# EAGLE board hw-proto02 (EAGLE 7.3.0)
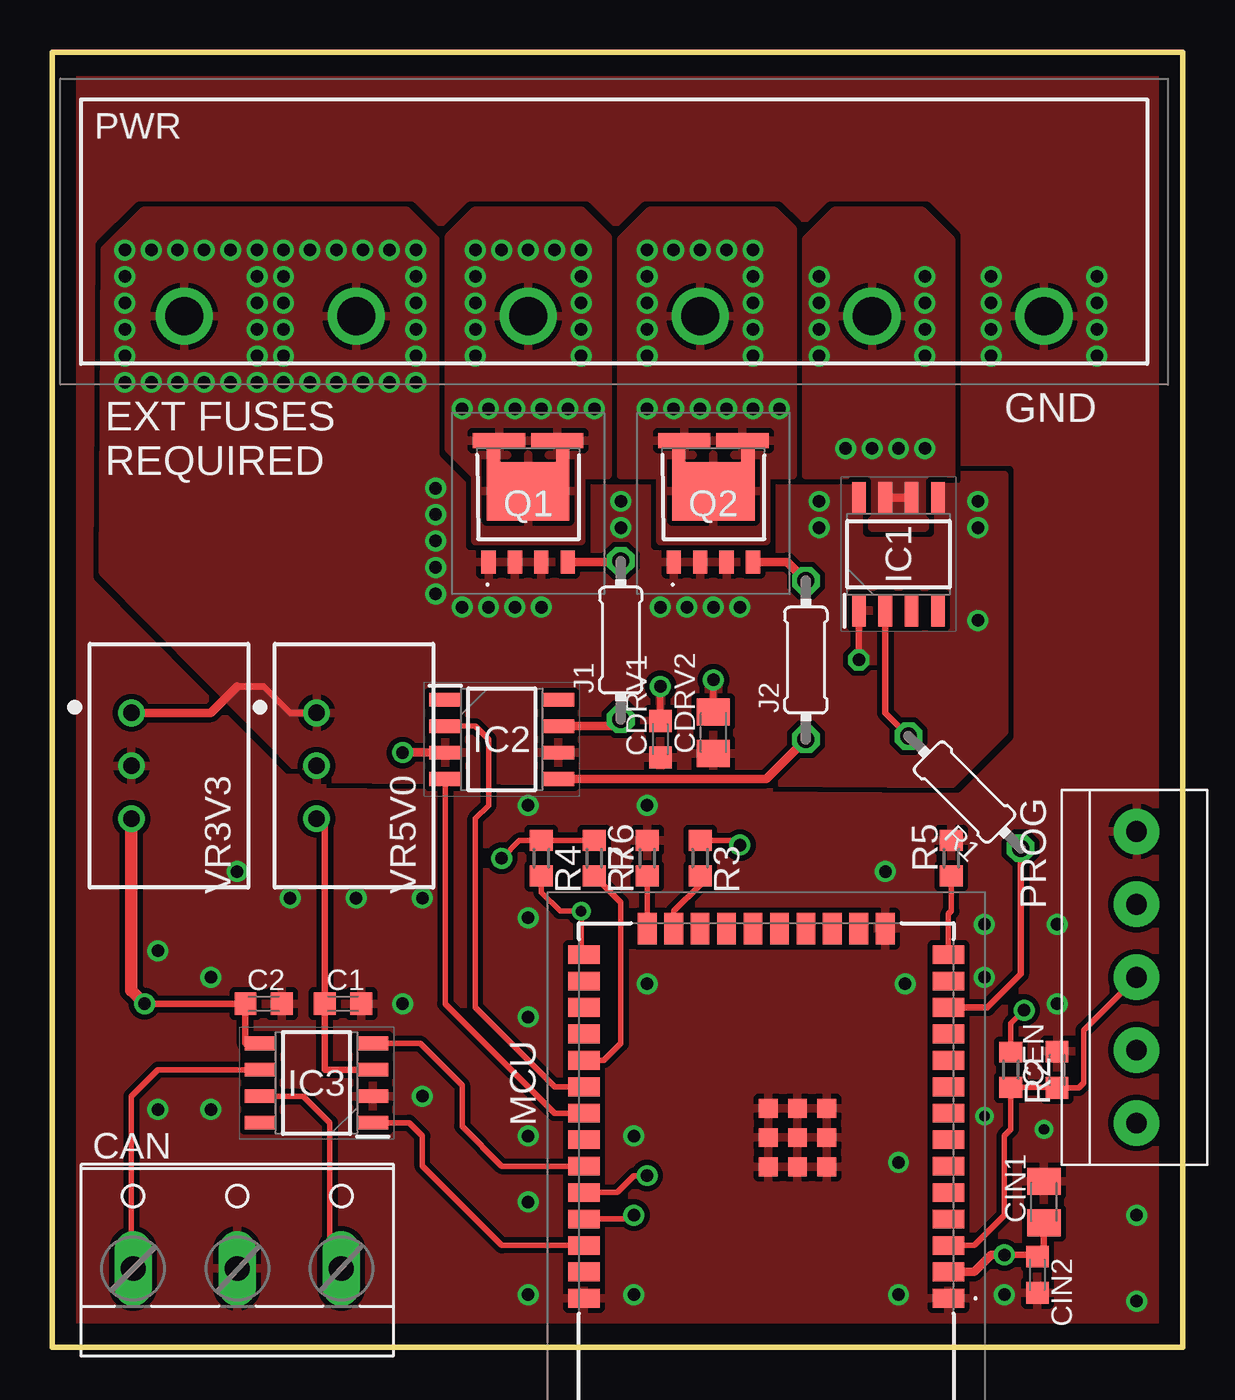
[diagram p0: board, top side]
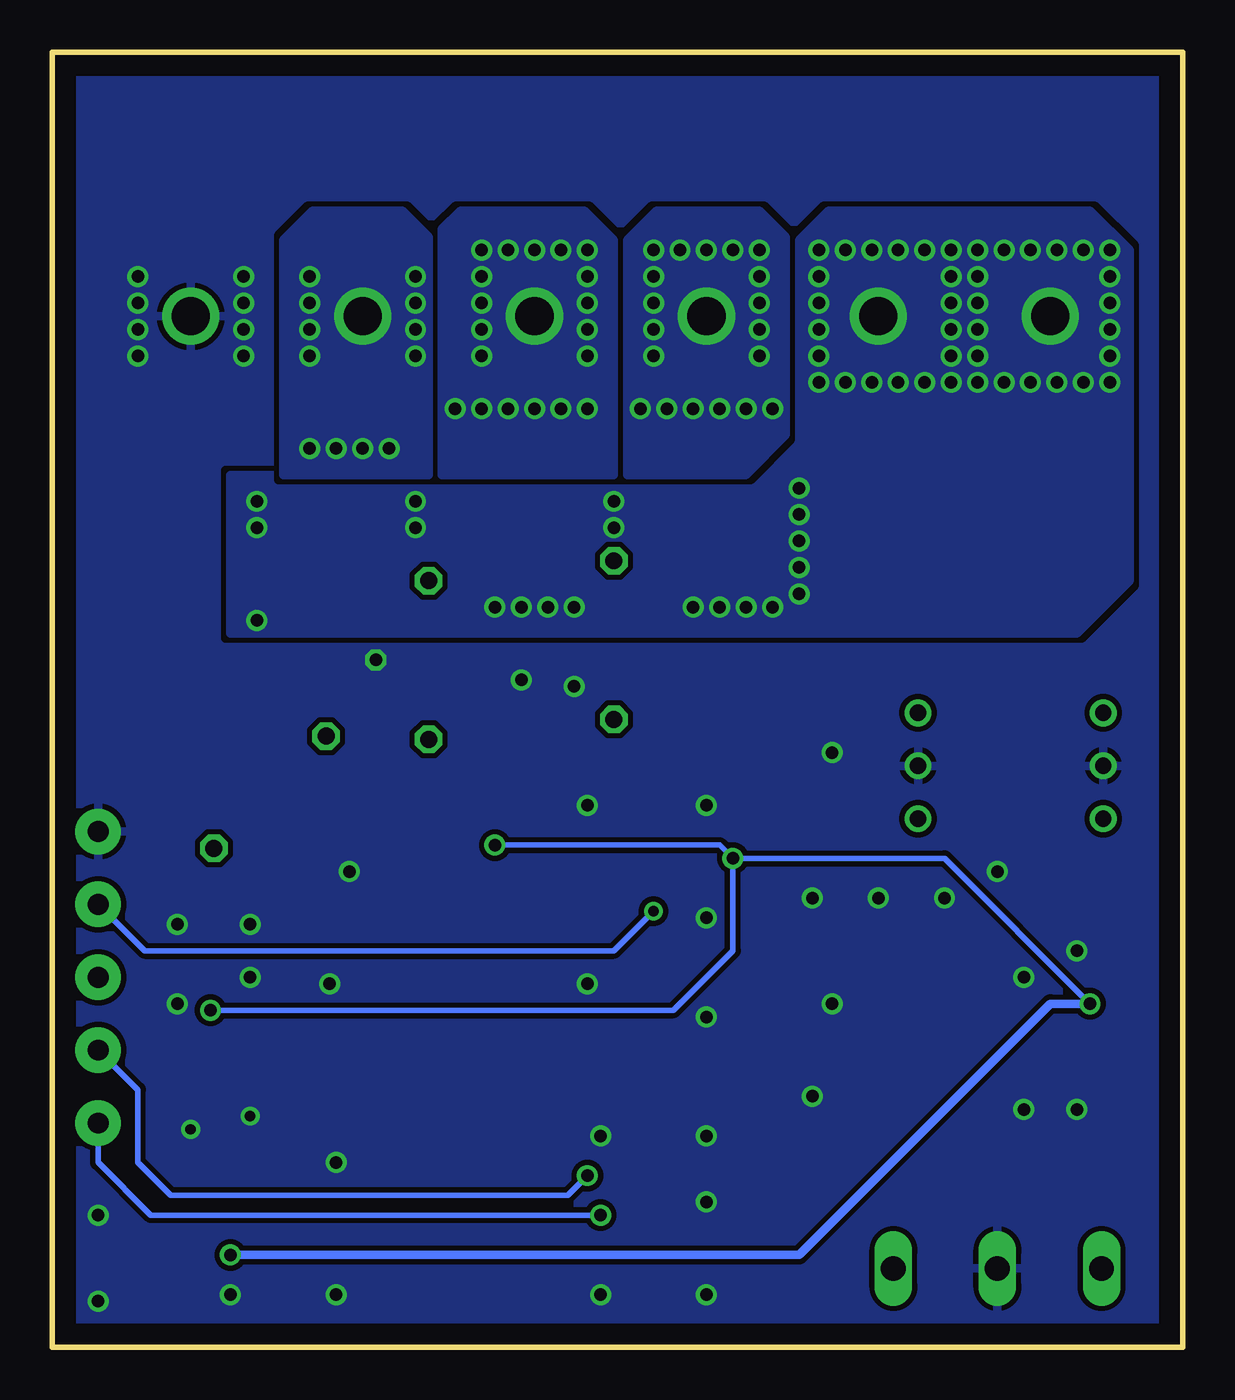
[diagram p1: board, bottom side, seen from below]

Size 54.28 x 62.22 mm. Coordinates in mm from the lower left corner, seen from the top.
Outline: 0,0 54.28,0 54.28,62.22 0,62.22 0,0
Copper layers (1*16): Top 0.035mm / dielectric 1.5mm / Bottom 0.035mm
Design rules "default": minimum track width 10mil, minimum drill 24mil, track to track 8mil, track to pad 8mil, pad to pad 8mil, via to via 8mil, smd to smd 8mil, copper to edge 40mil, drill to drill 8mil, minimum pad ring 10mil, minimum via ring 8mil, stop-mask expansion 4mil, vias tented up to drill 0mil, thermal gap 10mil

## Footprints (pad centres in the part's own frame; a part is rotated, then mirrored left to right if it is on the bottom)
C0603K = smd 1.05 x 1.08: 1 -0.875,0; 2 0.875,0
W237-103 = drill 1.194 long: 1 -5,-1.29; 2 0,-1.29; 3 5,-1.29
C0805K = smd 1.3 x 1.6: 1 -1,0; 2 1,0
SOIC127P600X175-8N = smd 1.525 x 0.65: 1 -2.712,1.905; 2 -2.712,0.635; 3 -2.712,-0.635; 4 -2.712,-1.905; 5 2.712,-1.905; 6 2.712,-0.635; 7 2.712,0.635; 8 2.712,1.905
SOIC127P600X175-8N' = smd 1.5 x 0.65: 1 -2.7,1.905; 2 -2.7,0.635; 3 -2.7,-0.635; 4 -2.7,-1.905; 5 2.7,-1.905; 6 2.7,-0.635; 7 2.7,0.635; 8 2.7,1.905
0204/7 = drill 0.813 octagon: 1 -3.81,0; 2 3.81,0
ESP32WROOM32EN8R2 = smd 1.5 x 0.9: 1 -8.75,5.26; 2 -8.75,3.99; 3 -8.75,2.72; 4 -8.75,1.45; 5 -8.75,0.18; 6 -8.75,-1.09; 7 -8.75,-2.36; 8 -8.75,-3.63; 9 -8.75,-4.9; 10 -8.75,-6.17; 11 -8.75,-7.44; 12 -8.75,-8.71; 13 -8.75,-9.98; 14 -8.75,-11.25; 25 8.75,-11.25; 26 8.75,-9.98; 27 8.75,-8.71; 28 8.75,-7.44; 29 8.75,-6.17; 30 8.75,-4.9; 31 8.75,-3.63; 32 8.75,-2.36; 33 8.75,-1.09; 34 8.75,0.18; 35 8.75,1.45; 36 8.75,2.72; 37 8.75,3.99; 38 8.75,5.26 | smd 0.9 x 1.5: 15 -5.715,-12.5; 16 -4.445,-12.5; 17 -3.175,-12.5; 18 -1.905,-12.5; 19 -0.635,-12.5; 20 0.635,-12.5; 21 1.905,-12.5; 22 3.175,-12.5; 23 4.445,-12.5; 24 5.715,-12.5 | smd 0.9 x 0.9: 39 -1.5,-2.46; 40 -2.9,-2.46; 41 -2.9,-3.86; 42 -1.5,-3.86; 43 -0.1,-3.86; 44 -0.1,-2.46; 45 -0.1,-1.06; 46 -1.5,-1.06; 47 -2.9,-1.06
1X05-3.5MM = drill 1 pad 2.184: 1 7,0; 2 3.5,0; 3 0,0; 4 -3.5,0; 5 -7,0
4DBP10806 = drill 1.829 pad 2.743: 1 0,0; 2 8.255,0; 3 16.51,0; 4 24.765,0; 5 33.02,0; 6 41.275,0
SQJ147ELPT1_GE3 = smd 0.68 x 1.1: 1 -1.905,-2.913; 2 -0.635,-2.913; 3 0.635,-2.913; 4 1.905,-2.913 | smd 2.5 x 0.71: 5 1.4,2.913; 6 -1.4,2.913 | smd 0.63 x 0.66: 7 1.665,2.228; 8 -1.665,2.228 | smd 3.96 x 2.82: 9 0,0.487
R0603 = smd 1 x 1.1: 1 -0.85,0; 2 0.85,0
TSR-1-2433 = drill 0.78 pad 1.28: 1 -2.54,0; 2 0,0; 3 2.54,0

## Placement (x,y rotation side)
C1  100n  [C0603K]  13.97,16.51 0 top
C2  100n  [C0603K]  10.16,16.51 0 top
CAN  [W237-103]  8.89,5.08 0 top
CDRV1  100n  [C0603K]  29.21,29.21 90 top
CDRV2  4u7  [C0805K]  31.75,29.53 90 top
CEN  1u  [C0603K]  48.26,13.34 90 top
CIN1  22u  [C0805K]  47.62,6.99 90 top
CIN2  100n  [C0603K]  47.31,3.49 270 top
IC1  [SOIC127P600X175-8N]  40.64,38.1 90 top
IC2  UCC27523DR  [SOIC127P600X175-8N]  21.59,29.21 0 top
IC3  MCP2562T  [SOIC127P600X175-8N']  12.7,12.7 180 top
J1  10  [0204/7]  27.3,33.97 90 top
J2  10  [0204/7]  36.2,33.02 90 top
MCU  ESP32-WROOM-32E  [ESP32WROOM32EN8R2]  34.29,7.62 180 top
PROG  1X5  [1X05-3.5MM]  52.07,17.78 270 top
PWR  [4DBP10806]  6.35,49.53 0 top
Q1  SQJ147ELP-T1_GE3  [SQJ147ELPT1_GE3]  22.86,40.64 0 top
Q2  SQJ147ELP-T1_GE3  [SQJ147ELPT1_GE3]  31.75,40.64 0 top
R1  100  [0204/7]  43.81,26.67 135 top
R2  10K0  [R0603]  46.04,13.34 270 top
R3  47K0  [R0603]  31.11,23.5 270 top
R4  47K0  [R0603]  23.5,23.5 270 top
R5  47K0  [R0603]  43.18,23.5 90 top
R6  47K0  [R0603]  28.57,23.5 90 top
R7  47K0  [R0603]  26.04,23.5 270 top
VR3V3  +3V3  [TSR-1-2433]  3.81,27.94 270 top
VR5V0  +5V  [TSR-1-2433]  12.7,27.94 270 top

## Library data of the parts
C1 C2 CDRV1 CDRV2 CEN CIN1 CIN2 J1 J2 R1-R7 = rcl
CAN = con-wago-500; MPN: 237-103; OC_FARNELL: unknown; OC_NEWARK: 18M7116
IC1 = VN5E160MSTR-E; DESCRIPTION: Gate Drivers SNGL CH HI-SIDE DRVR W/ANALOG CRRNT SNSE; HEIGHT: 1.75mm; MANUFACTURER_NAME: STMicroelectronics; MANUFACTURER_PART_NUMBER: VN5E160MSTR-E; MOUSER_PART_NUMBER: 511-VN5E160MSTR-E; MOUSER_PRICE-STOCK: https://www.mouser.co.uk/ProductDetail/STMicroelectronics/VN5E160MSTR-E?qs=WSSg0AwdCh77XxtxsYEeyw%3D%3D
IC2 = UCC27523DR-fet-driver; DESCRIPTION: Dual, 5A, High-Speed Low-Side Power MOSFET Driver; HEIGHT: 1.75mm; MANUFACTURER_NAME: Texas Instruments; MANUFACTURER_PART_NUMBER: UCC27523DR; MOUSER_PART_NUMBER: 595-UCC27523DR; MOUSER_PRICE-STOCK: https://www.mouser.co.uk/ProductDetail/Texas-Instruments/UCC27523DR/?qs=JK0Mn6q9DKQ5jNt3UHw5hw%3D%3D
IC3 = MCP2562T-H_SN; DESCRIPTION: CAN Interface IC; HEIGHT: 1.75mm; MANUFACTURER_NAME: Microchip; MANUFACTURER_PART_NUMBER: MCP2562T-H/SN; MOUSER_PART_NUMBER: 579-MCP2562T-H/SN; MOUSER_PRICE-STOCK: https://www.mouser.co.uk/ProductDetail/Microchip-Technology/MCP2562T-H-SN?qs=eTPcRhULBzwloCb8Xxk0jQ%3D%3D
MCU = ESP32-WROOM-32E-N8R2; DESCRIPTION: Multiprotocol Modules ESP32-WROOM-32E integrates ESP32-D0WD-V3, with higher stability and safety performance.; HEIGHT: 3.25mm; MANUFACTURER_NAME: Espressif Systems; MANUFACTURER_PART_NUMBER: ESP32-WROOM-32E-N8R2; MOUSER_PART_NUMBER: 356-ESP32WRM32EN8R2; MOUSER_PRICE-STOCK: https://www.mouser.co.uk/ProductDetail/Espressif-Systems/ESP32-WROOM-32E-N8R2?qs=By6Nw2ByBD0mvGJSS3Ohlw%3D%3D
PROG = adafruit
PWR = 4DB-P108-06; DESCRIPTION: Dual Barrier, Printed Circuit Pin, Wire-to-Board, 6 Position, 8.26 mm [.325 in] Centerline, 1 Row, Buchanan 4DB Series, Barrier Strips; HEIGHT: 13.716mm; MANUFACTURER_NAME: TE Connectivity; MANUFACTURER_PART_NUMBER: 4DB-P108-06; MOUSER_PART_NUMBER: N/A; MOUSER_PRICE-STOCK: https://www.mouser.co.uk/ProductDetail/TE-Connectivity/4DB-P108-06?qs=JZD3Rbs9Xzm1xbyNfnCHaQ%3D%3D
Q1 Q2 = transistor-vishay-pchan-pso8; DESCRIPTION: MOSFET P-CHANNEL 40-V (D-S) 175C MOSFET; HEIGHT: 1.227mm; MANUFACTURER_NAME: Vishay; MANUFACTURER_PART_NUMBER: SQJ147ELP-T1_GE3; MOUSER_PART_NUMBER: 78-SQJ147ELP-T1_GE3; MOUSER_PRICE-STOCK: https://www.mouser.co.uk/ProductDetail/Vishay-Siliconix/SQJ147ELP-T1_GE3?qs=81r%252BiQLm7BRdyhBg3DuaKw%3D%3D
VR3V3 VR5V0 = TSR_1-2433E; DESCRIPTION: 1 Amp POL converter, industrial, 6-36 VDC input, pos.-pos. circuit, cost efficient, LM78 compatible, SIP-3; HEIGHT: mm; MANUFACTURER_NAME: Traco Power; MANUFACTURER_PART_NUMBER: TSR 1-2433E; MOUSER_PART_NUMBER: 495-TSR1-2433E; MOUSER_PRICE-STOCK: https://www.mouser.co.uk/ProductDetail/TRACO-Power/TSR-1-2433E?qs=vmHwEFxEFR9haWIzn8wG3A%3D%3D

## Nets
+3V3: C2.1 CIN1.1 CIN2.1 IC3.5 MCU.2 R2.1 R3.1 R4.1 R7.1 VR3V3.3
+5V: C1.1 IC3.3 VR5V0.3
+12V: CDRV1.1 CDRV2.1 IC1.5 IC1.8 IC2.6 PWR.1 PWR.2 Q1.1 Q1.2 Q1.3 Q2.1 Q2.2 Q2.3 VR3V3.1 VR5V0.1
CAN_RX: IC3.4 MCU.33
CAN_TX: IC3.1 MCU.36
CTL1: IC2.2 MCU.30
CTL2: IC2.4 MCU.31
CTL3: MCU.12 R1.1
CTL4: MCU.11
EN: CEN.1 MCU.3 PROG.3 R2.2
GND: C1.2 C2.2 CAN.2 CDRV1.2 CDRV2.2 CEN.2 CIN1.2 CIN2.2 IC1.1 IC2.3 IC3.2 MCU.1 MCU.15 MCU.38 MCU.39 MCU.40 MCU.41 MCU.42 MCU.43 MCU.44 MCU.45 MCU.46 MCU.47 PROG.5 PWR.6 R5.2 R6.2 VR3V3.2 VR5V0.2
GPIO0: MCU.25 PROG.4 R4.2
GPIO2: MCU.24 R6.1
GPIO5: MCU.29 R7.2
GPIO12: MCU.14 R5.1
GPIO15: MCU.23 R3.2
N$1: CAN.3 IC3.7
N$2: CAN.1 IC3.6
N$3: IC2.5 J2.1
N$4: IC2.7 J1.1
N$5: J1.2 Q1.4
N$6: J2.2 Q2.4
N$7: IC1.2 R1.2
RXD0: MCU.34 PROG.2
SW1: PWR.3 Q1.5 Q1.6 Q1.7 Q1.8 Q1.9
SW2: PWR.4 Q2.5 Q2.6 Q2.7 Q2.8 Q2.9
SW3: IC1.6 IC1.7 PWR.5
TXD0: MCU.35 PROG.1

## Tracks (layer width: path | path; a pad name or v marks a point on that pad's centre or on a via)
+3V3  (via drill 0.6)
  Top 0.254: R7.1 R4.1 22.44,24.34 v21.59,23.5 | R3.1 33.02,24.34 v33.02,24.13 | R2.1 46.04,15.56 v46.67,16.19
  Top 0.305: v4.45,16.51 C2.1 9.29,14.61 IC3.5 | v45.72,4.45 47.23,4.45 CIN2.1 47.62,4.69 CIN1.1
  Top 0.406: MCU.2 44.27,3.63 45.08,4.45 v45.72,4.45
  Top 0.61: VR3V3.3 3.81,17.14 v4.45,16.51
  Bottom 0.254: v21.59,23.5 11.43,23.5 v4.45,16.51 | v33.02,24.13 22.23,24.13 v21.59,23.5 | v46.67,16.19 24.45,16.19 21.59,19.05 v21.59,23.5
  Bottom 0.406: v45.72,4.45 18.41,4.45 6.35,16.51 v4.45,16.51
+5V
  Top 0.305: IC3.3 13.1,13.34 C1.1 13.1,25 VR5V0.3
+12V  (via drill 0.6)
  Top 0.305: 8.89,31.75 10.16,31.75 11.43,30.48 VR5V0.1
  Top 0.406: VR3V3.1 7.62,30.48 8.89,31.75
  other vias: 3.49,51.43 17.46,50.16 17.46,48.89 17.46,47.62 3.49,50.16 3.49,48.89 3.49,47.62 18.41,37.46 18.41,36.2 44.45,39.37 44.45,34.92 44.45,40.64 3.49,46.35 4.76,46.35 6.03,46.35 7.3,46.35 8.57,46.35 9.84,46.35 11.11,46.35 12.38,46.35 19.68,35.56 20.96,35.56 22.23,35.56 23.5,35.56 18.41,38.73 18.41,40 27.3,40.64 27.3,39.37 29.21,35.56 30.48,35.56 31.75,35.56 33.02,35.56 36.83,40.64 36.83,39.37 18.41,41.27 13.65,46.35 14.92,46.35 16.19,46.35 17.46,46.35 9.84,47.62 9.84,48.89 9.84,50.16 9.84,51.43 11.11,51.43 11.11,50.16 11.11,48.89 11.11,47.62 3.49,52.7 4.76,52.7 6.03,52.7 7.3,52.7 8.57,52.7 9.84,52.7 11.11,52.7 12.38,52.7 13.65,52.7 14.92,52.7 16.19,52.7 17.46,52.7 17.46,51.43
  pour Top (isolate 0.254, rank 4): 2.42,37.23 2.53,52.72 4.43,54.61 17,54.61 18.41,53.19 18.41,44.16 20.66,41.91 45.72,41.91 45.72,29.58 43.2,27.07 12.27,27.3
  pour Top (isolate 0.254, rank 4, no thermals): 35.56,41.91 45.72,41.91 45.72,33.02 35.56,33.02
  pour Bottom (isolate 0.254, rank 4, no thermals): 17,54.61 4.45,54.61 2.54,52.7 2.54,36.83 5.08,34.29 45.72,34.29 45.72,41.91 20.66,41.91 18.41,44.16 18.41,53.19
CAN_RX
  Top 0.254: MCU.33 21.6,8.71 19.68,10.62 19.68,12.6 17.68,14.61 IC3.4
CAN_TX
  Top 0.254: IC3.1 17.14,10.79 17.78,10.16 17.78,8.71 21.59,4.9 MCU.36
CTL1
  Top 0.254: MCU.30 24.14,12.52 20.32,16.34 20.32,25.4 20.96,26.04 20.96,29.21 20.32,29.84 IC2.2
CTL2
  Top 0.254: MCU.31 24.13,11.25 18.88,16.51 IC2.4
CTL3
  Top 0.305: MCU.12 44.9,16.33 46.51,17.93 R1.1
EN
  Top 0.254: MCU.3 44.27,4.9 45.72,6.35 45.72,10.16 46.04,10.48 R2.2 48.23,12.49 CEN.1 49.29,12.46 49.53,12.7 49.53,15.24 PROG.3
GND  (via drill 0.5, 0.6)
  Top 0.305: IC1.1 v38.73,33.02 | v29.21,31.75 CDRV1.2 | v31.75,32.07 CDRV2.2
  Top 0.406: IC2.3 v16.83,28.57
  other vias: 17.78,12.07 22.86,10.16 22.86,20.64 22.86,2.54 45.72,2.54 22.86,26.04 22.86,15.88 28.57,26.04 22.86,6.99 17.78,21.59 14.61,21.59 11.43,21.59 40,22.86 7.62,17.78 5.08,19.05 8.89,22.86 52.07,2.22 47.62,10.48 44.77,11.11 16.83,16.51 45.08,47.62 45.08,48.89 45.08,50.16 45.08,51.43 50.16,51.43 50.16,50.16 50.16,48.89 50.16,47.62 40.96,17.46 28.57,17.46 44.77,17.78 44.77,20.32 27.94,2.54 40.64,2.54 40.64,8.89 27.94,10.16 52.07,6.35 48.26,16.51 48.26,20.32 5.08,11.43 7.62,11.43
  pour Bottom (isolate 0.254, rank 6): 0,62.23 54.61,62.23 54.61,0 0,0
  pour Top (isolate 0.254, rank 6): 0,62.23 54.61,62.23 54.61,0 0,0
GPIO0  (via drill 0.5)
  Top 0.254: MCU.25 25.54,19.05 25.4,19.05 v25.4,20.96 24.39,20.96 23.5,21.85 R4.2
  Bottom 0.254: PROG.4 49.84,19.05 27.3,19.05 v25.4,20.96
GPIO2
  Top 0.254: MCU.24 R6.1
GPIO5
  Top 0.254: R7.2 27.3,21.38 27.3,14.61 26.49,13.79 MCU.29
GPIO12
  Top 0.254: MCU.14 43.04,20.82 43.18,20.96 R5.1
GPIO15
  Top 0.254: MCU.23 29.84,20.96 31.11,22.23 R3.2
N$1
  Top 0.254: IC3.7 12.07,12.07 13.34,10.79 13.34,4.35 CAN.3
N$2
  Top 0.254: IC3.6 5.08,13.34 3.81,12.07 3.81,3.87 CAN.1
N$3
  Top 0.406: J2.1 34.29,27.3 IC2.5
N$4
  Top 0.406: IC2.7 26.99,29.84 J1.1
N$5
  Top 0.406: Q1.4 27.25,37.73 J1.2
N$6
  Top 0.406: Q2.4 35.3,37.73 J2.2
N$7
  Top 0.305: IC1.2 40,30.48 R1.2
RXD0  (via drill 0.6)
  Top 0.254: MCU.34 27.12,7.44 27.94,8.26 v28.57,8.26
  Bottom 0.254: PROG.2 50.16,12.38 50.16,8.89 48.58,7.3 29.53,7.3 v28.57,8.26
SW1  (via drill 0.6)
  Top 0.406: Q1.6 21.2,43.55 Q1.8 | Q1.5 24.53,43.55 Q1.7
  other vias: 22.23,45.08 20.32,47.62 20.32,48.89 20.32,50.16 20.32,51.43 25.4,51.43 25.4,50.16 25.4,48.89 25.4,47.62 23.5,45.08 19.68,45.08 22.23,45.08 20.96,45.08 24.77,45.08 26.04,45.08 20.32,52.7 21.59,52.7 22.86,52.7 24.13,52.7 25.4,52.7
  pour Top (isolate 0.254): 20.32,41.91 19.05,43.18 19.05,53.34 20.32,54.61 25.4,54.61 26.67,53.34 26.67,41.91 25.4,41.91 25.4,38.73 20.32,38.73
  pour Bottom (isolate 0.254, rank 2, no thermals): 26.67,41.91 20.98,41.91 19.05,43.84 19.05,53.34 20.32,54.61 25.25,54.61 26.67,53.19
SW2  (via drill 0.6)
  Top 0.406: Q2.6 30.09,43.55 Q2.8 | Q2.5 33.41,43.55 Q2.7 33.41,41.13 Q2.9
  other vias: 28.57,51.43 28.57,50.16 28.57,48.89 28.57,47.62 31.11,45.08 33.65,51.43 33.65,50.16 33.65,48.89 33.65,47.62 32.38,45.08 33.65,45.08 34.92,45.08 29.84,45.08 28.57,45.08 28.57,51.43 28.57,52.7 28.57,52.7 29.84,52.7 31.11,52.7 32.38,52.7 33.65,52.7
  pour Top (isolate 0.254, rank 2): 27.3,41.91 27.3,53.19 28.72,54.61 34.66,54.61 35.56,53.71 35.56,41.91 34.29,41.91 34.29,38.73 29.21,38.73 29.21,41.91
  pour Bottom (isolate 0.254, rank 2, no thermals): 27.3,41.91 27.3,53.19 28.72,54.61 34.66,54.61 35.56,53.71 35.56,41.91
SW3  (via drill 0.6)
  Top 0.406: IC1.6 IC1.7
  other vias: 36.83,51.43 41.91,51.43 41.91,50.16 41.91,48.89 41.91,47.62 36.83,47.62 38.1,43.18 41.91,43.18 39.37,43.18 40.64,43.18 36.83,50.16 36.83,48.89
  pour Top (isolate 0.254, rank 3): 39.37,39.37 39.37,41.91 36.2,41.91 36.2,53.19 37.61,54.61 41.76,54.61 43.18,53.19 43.18,41.91 41.91,41.91 41.91,39.37
  pour Top (isolate 0.254, rank 2, no thermals): 39.37,41.91 39.37,39.37 41.91,39.37 41.91,41.91
  pour Bottom (isolate 0.254, rank 2, no thermals): 43.18,41.91 36.2,41.91 36.2,53.34 37.46,54.61 41.76,54.61 43.18,53.19
TXD0  (via drill 0.6)
  Top 0.254: MCU.35 27.76,6.17 v27.94,6.35
  Bottom 0.254: PROG.1 52.07,8.89 49.53,6.35 v27.94,6.35

## Text on the board
tNames: GND | EXT FUSES / REQUIRED